# Altium PCB PCB08.PcbDoc
Units mm, origin at the board's own origin, x right, y up, seen from the top; angles counter-clockwise.
Board outline 100 x 100 mm, 2 copper layers (Top Layer, Bottom Layer), stack 1.67 mm thick; 12 components, 2 nets, 12 pads, 16 vias.
Unrouted connection lines stored in the file: 2.
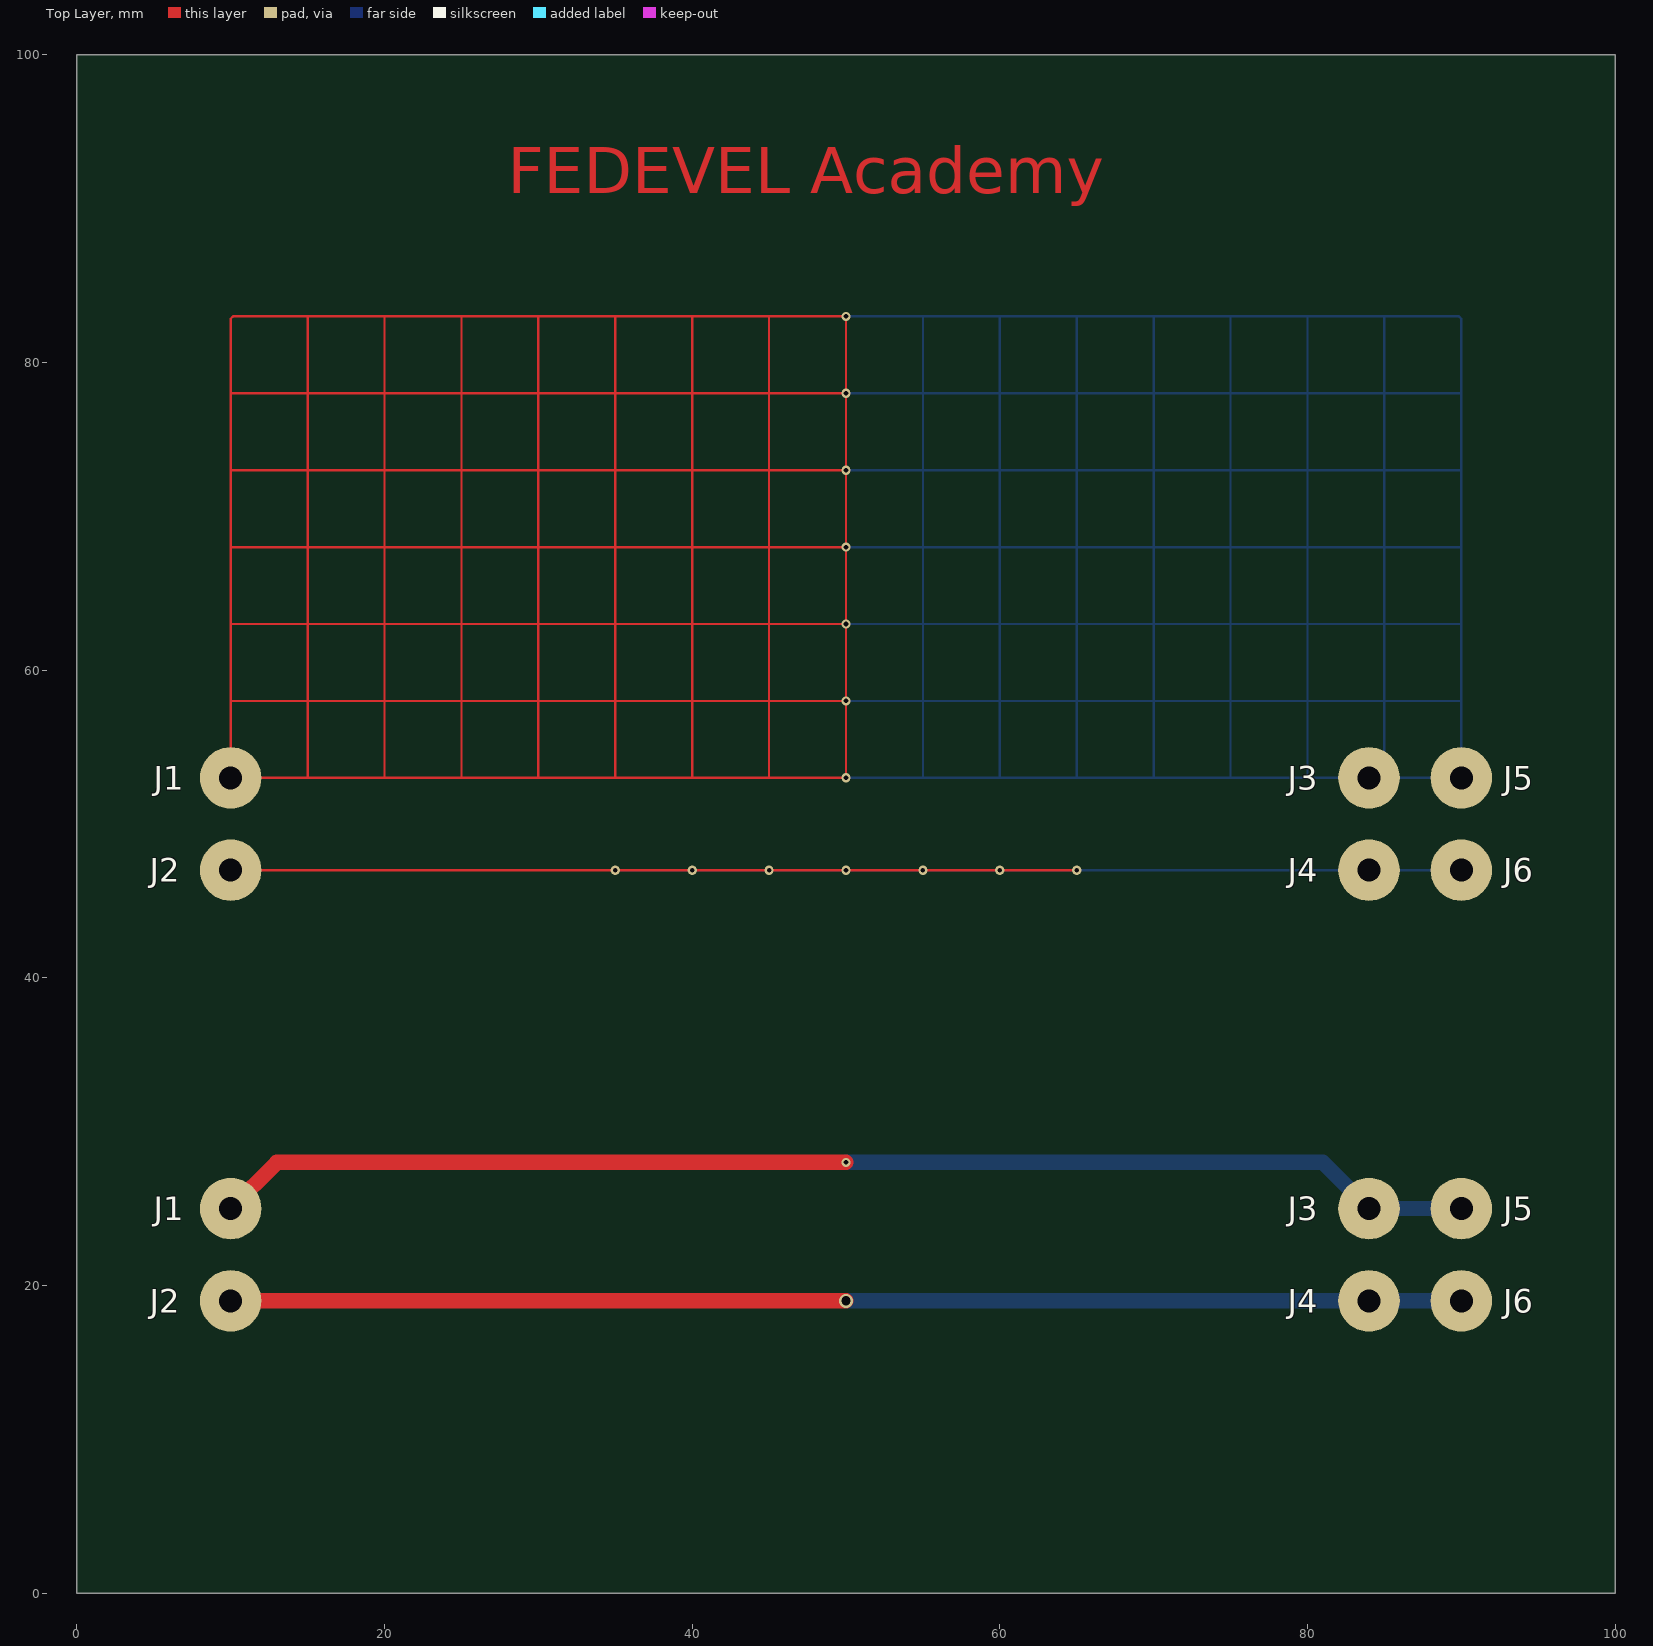
[diagram p0: Top Layer view]
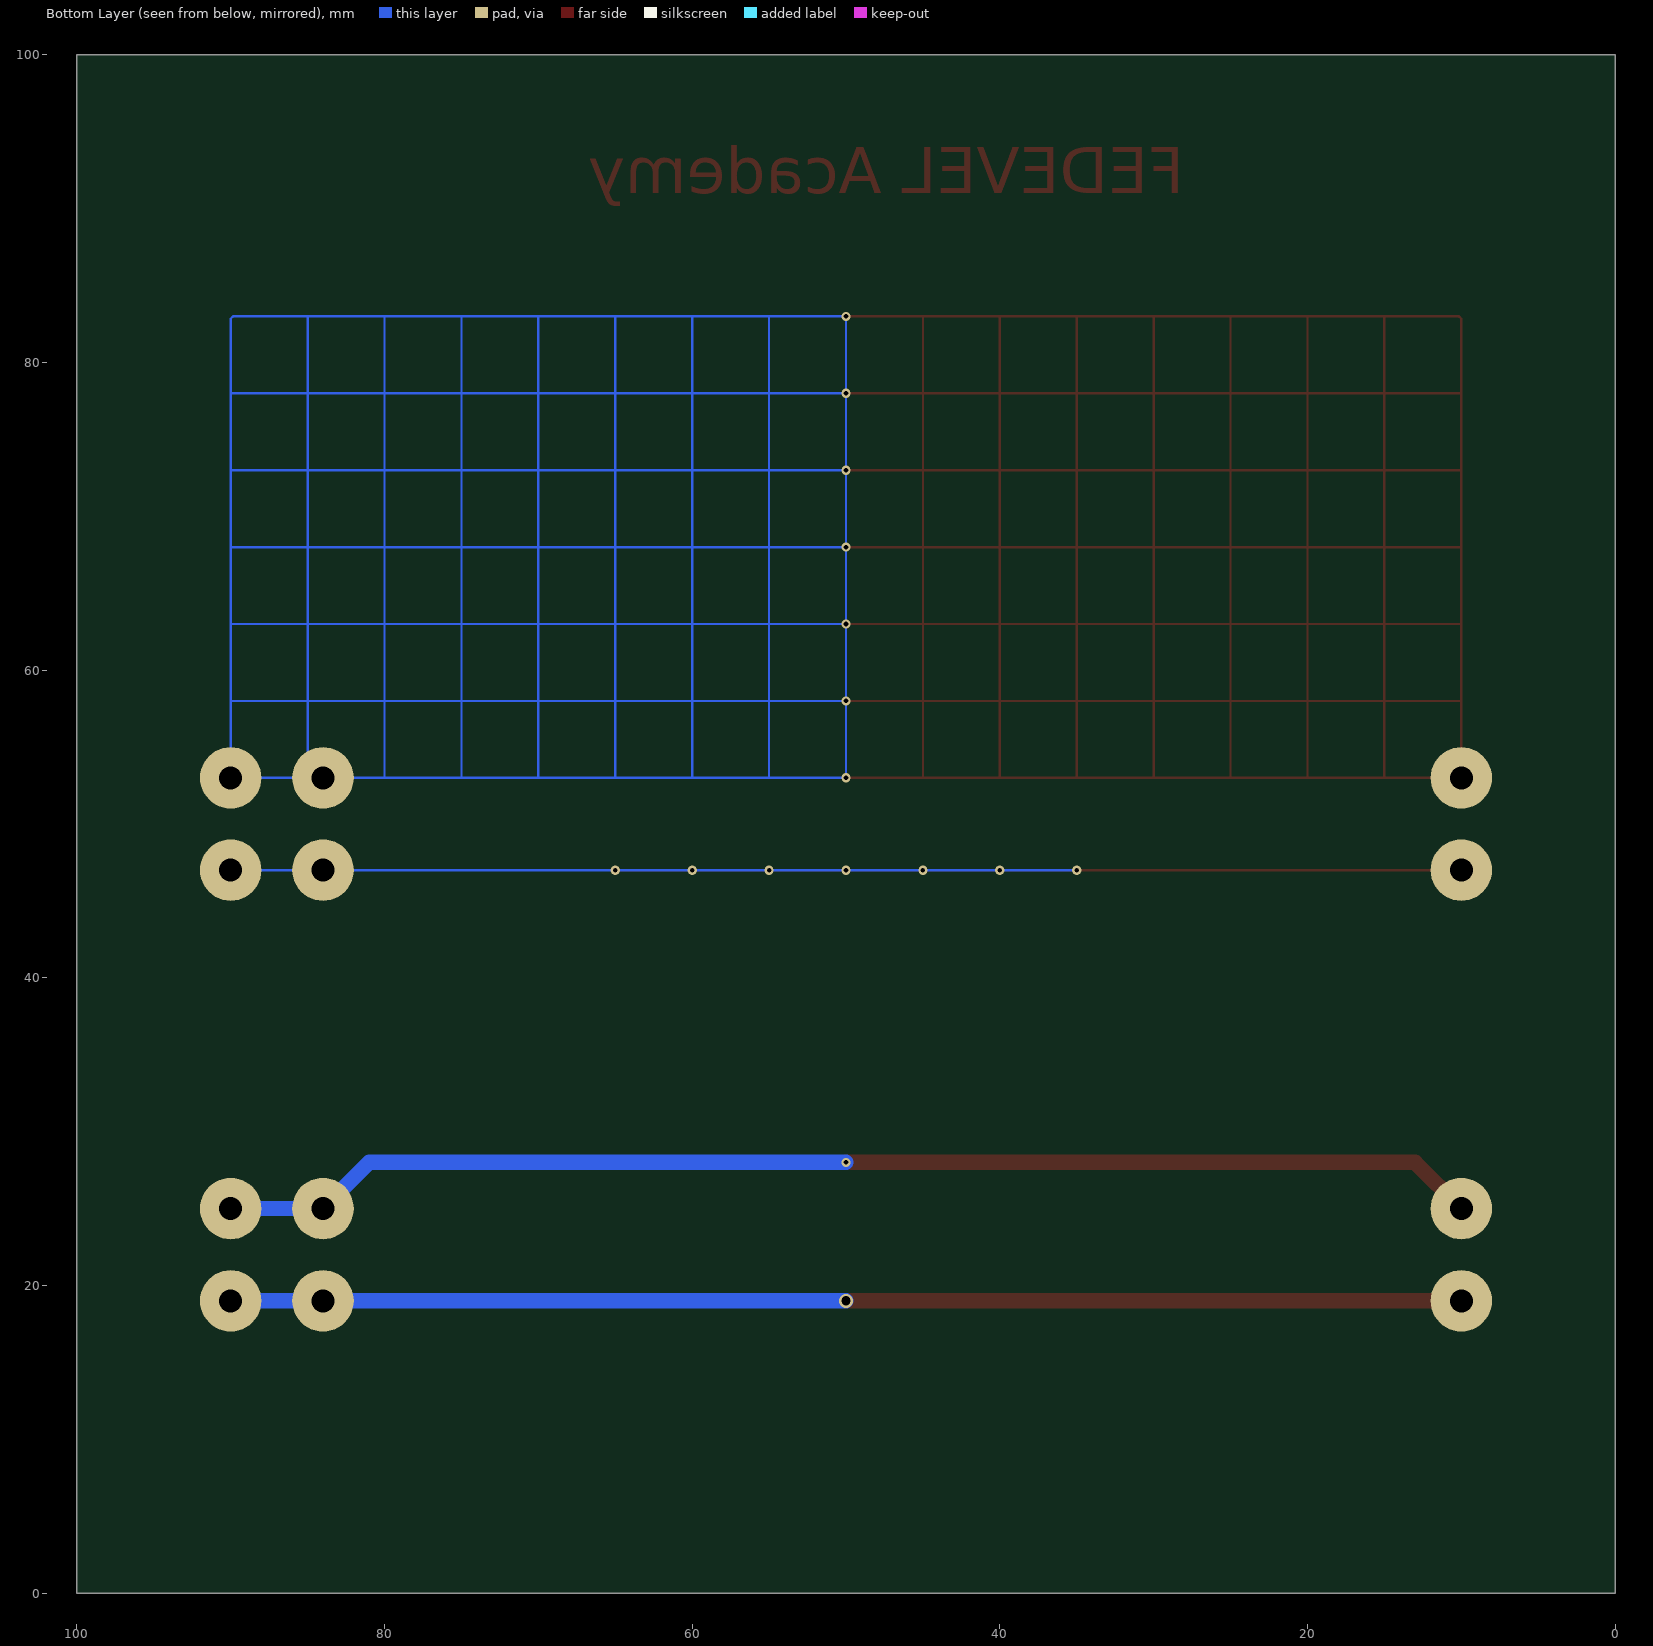
[diagram p1: Bottom Layer view, seen from below]

## Layer stack, top to bottom
Top Solder: solder mask 0.0254, SM-001, Dk 4
Top Layer: signal copper 0.035
Dielectric 1: core 1.6, Core-043, Dk 4.5
Bottom Layer: signal copper 0.035
Bottom Solder: solder mask 0.0254, SM-001, Dk 4

## Board outline
0,0 100,0 100,100 0,100

## Design rules (kind name [scope] priority, off if disabled: settings)
Clearance [All] p1: gap=0.3 ignorepadtopadclearanceinfootprint=FALSE
PlaneConnect [All] p1: planeconnectstyle=Direct reliefexpansion=0.508 reliefentries=4 reliefconductorwidth=0.254 reliefairgap=0.254
PolygonConnect [All] p1: connectstyle=Direct reliefconductorwidth=0.254 reliefentries=4 polygonreliefangle="90 Angle" airgapwidth=0.254
RoutingVias [All] p1: holewidth=0.3 width=0.6 viastyle="Through Hole" minholewidth=0.3 minwidth=0.6 maxholewidth=0.3 maxwidth=0.6
SolderMaskExpansion [All] p1: expansion=0.102 istentingtop=FALSE
Width [All] p1: maxlimit=1 minlimit=0.15 preferedwidth=0.15
29 further rules are at their usual default settings.

## Components (designator, comment, footprint, x,y, rotation, side; value= is the part's Value field where it differs from the comment)
J1 "4MMx1.5MM" PAD_WITH_HOLE_4MMx1MM5 10,25 r0 top
J1 "4MMx1.5MM" PAD_WITH_HOLE_4MMx1MM5 10,53 r0 top
J2 "4MMx1.5MM" PAD_WITH_HOLE_4MMx1MM5 10,19 r0 top
J2 "4MMx1.5MM" PAD_WITH_HOLE_4MMx1MM5 10,47 r0 top
J3 "4MMx1.5MM" PAD_WITH_HOLE_4MMx1MM5 84,25 r0 top
J3 "4MMx1.5MM" PAD_WITH_HOLE_4MMx1MM5 84,53 r0 top
J4 "4MMx1.5MM" PAD_WITH_HOLE_4MMx1MM5 84,19 r0 top
J4 "4MMx1.5MM" PAD_WITH_HOLE_4MMx1MM5 84,47 r0 top
J5 "4MMx1.5MM" PAD_WITH_HOLE_4MMx1MM5 90,25 r0 top
J5 "4MMx1.5MM" PAD_WITH_HOLE_4MMx1MM5 90,53 r0 top
J6 "4MMx1.5MM" PAD_WITH_HOLE_4MMx1MM5 90,19 r0 top
J6 "4MMx1.5MM" PAD_WITH_HOLE_4MMx1MM5 90,47 r0 top

## Footprints (in the part's own frame and the unit in brackets; to place one, negate y for a bottom-side part, rotate by r counter-clockwise, add the part's x,y. Pads: shape width x height; smd on the part's side, far side on the other; paste and mask are expansions set on the pad)
PAD_WITH_HOLE_4MMx1MM5 [mm]
  round 4 hole 1.5: 1(0,0)

## Part data
J1 J1 J2 J2 J3 J3 J4 J4 J5 J5 J6 J6: library part PAD_WITH_HOLE_4MMx1MM5, "Pad with a hole 4mm x 1.5mm"

## Via types
v1: diameter 0.6, hole 0.3, Top Layer to Bottom Layer, tented both sides, 15 vias
v2: diameter 0.9, hole 0.6, Top Layer to Bottom Layer, tented both sides, 1 vias

## Nets (pads, with @x,y where several pads share a name; then routed paths per layer and width w, separated by ;. In a path a pad name is that pad's centre, name@x,y a point inside that pad or via, vN(x,y) a via of type N, cw(c..) or ccw(c..) an arc to the next point about the centre after c; other vN are vias at no path point)
+VCC: J1.1 J3.1 J5.1 | length 1182.3
  Top Layer w0.15: 15,53 15,83 ; 20,53 20,83 ; 25,53 25,83 ; 30,53 30,83 ; 35,53 35,83 ; 40,53 40,83 ; 45,53 45,83 ; v1(50,58) 10,58 ; v1(50,63) 10,63 ; v1(50,68) 10,68 ; v1(50,73) 10,73 ; v1(50,78) 10,78 ; 10,58 10,63 ; 10,58 10,53 v1(50,53) v1(50,83) 10.149,83 10,82.851 10,78 ; 10,63 10,68 ; 10,68 10,73 ; 10,73 10,78
  Top Layer w1: J1.1@10,25 13,28 v1(50,28)
  Bottom Layer w0.15: v1(50,58) 90,58 ; v1(50,63) 90,63 ; v1(50,68) 90,68 ; v1(50,73) 90,73 ; v1(50,78) 90,78 ; 55,53 55,83 ; 60,53 60,83 ; 65,53 65,83 ; 70,53 70,83 ; 75,53 75,83 ; 80,53 80,83 ; J3.1@85,53 85,83 ; 90,58 90,53 v1(50,53) v1(50,83) 89.851,83 90,82.851 90,78 ; 90,58 90,63 ; 90,63 90,68 ; 90,68 90,73 ; 90,73 90,78
  Bottom Layer w1: v1(50,28) 81,28 84,25 J5.1@90,25
GND: J2.1 J4.1 J6.1 | length 222
  Top Layer w0.15: J2.1@10,47 v1(65,47)
  Top Layer w1: J2.1@10,19 v2(50,19)
  Bottom Layer w0.15: v1(65,47) v1(60,47) v1(55,47) v1(50,47) v1(45,47) v1(40,47) v1(35,47) 84,47 J6.1@90,47
  Bottom Layer w1: 52,19 51,19 v2(50,19) 84,19 J6.1@90,19

## Other copper
Top Layer:
  text "FEDEVEL Academy" at 28.007,91 h3

## Silkscreen, mask and mechanical layers (free items; w line width, h text height)
Top Solder:
  rectangle: 26,89 74,96
Board:
  the board outline again, w0.6